# EAGLE board BMP085 (EAGLE 4.16)
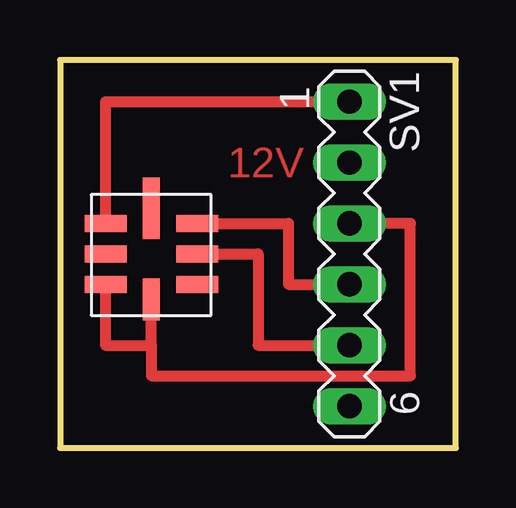
[diagram p0: board, top side]

Size 16.49 x 16.18 mm. Coordinates in mm from the lower left corner, seen from the top.
Outline: 0,0 16.49,0 16.49,16.18 0,16.18 0,0
Copper layers (1*2+15*16): Top 0.035mm / dielectric 0.2mm / Route2 0.035mm / dielectric 0.15mm / Route15 0.035mm / dielectric 0.2mm / Bottom 0.035mm
Design rules "default": minimum track width 10mil, minimum drill 24mil, track to track 8mil, track to pad 8mil, pad to pad 8mil, via to via 8mil, smd to smd 8mil, copper to edge 40mil, drill to drill 8mil, minimum pad ring 10mil, minimum via ring 8mil, stop-mask expansion 4mil, vias tented up to drill 0mil, thermal gap 10mil

## Footprints (pad centres in the part's own frame; a part is rotated, then mirrored left to right if it is on the bottom)
MA06-1 = drill 1.016 long: 1 -6.35,0; 2 -3.81,0; 3 -1.27,0; 4 1.27,0; 5 3.81,0; 6 6.35,0
LCC8 = smd 1.75 x 0.7: P$1 0,0; P$2 0,-1.27; P$3 0,-2.54; P$5 3.81,-2.54; P$6 3.81,-1.27; P$7 3.81,0 | smd 0.7 x 1.75: P$4 1.905,-3.175 | smd 0.7 x 2.55: P$8 1.905,0.635

## Placement (x,y rotation side)
SV1  [MA06-1]  12.06,8.09 270 top
U$1  BMP085  [LCC8]  1.9,9.36 0 top

## Library data of the parts
SV1 = con-lstb
U$1 = Stofer

## Nets
GND: SV1.1 U$1.P$1
SCK: SV1.5 U$1.P$6
SDA: SV1.4 U$1.P$7
VDD3_3: SV1.3 U$1.P$3 U$1.P$4

## Tracks (layer width: path | path; a pad name or v marks a point on that pad's centre or on a via)
GND
  Top 0.457: U$1.P$1 1.9,14.44 SV1.1
SCK
  Top 0.457: U$1.P$6 8.25,8.09 8.25,4.28 SV1.5
SDA
  Top 0.457: U$1.P$7 9.52,9.36 9.52,6.82 SV1.4
VDD3_3
  Top 0.457: 3.8,4.28 3.8,3.01 14.6,3.01 14.6,9.36 SV1.3 | 3.8,4.28 U$1.P$4 | U$1.P$3 1.9,4.28 3.8,4.28

## Text on the board
Top: 12V